# Altium PCB PCB2.PcbDoc
Units mil, origin at the board's own origin, x right, y up, seen from the top; angles counter-clockwise.
Board outline 6000 x 4000 mil, 2 copper layers (Top Layer, Bottom Layer); 24 components, 41 nets, 147 pads, 0 vias.
Unrouted connection lines stored in the file: 70.
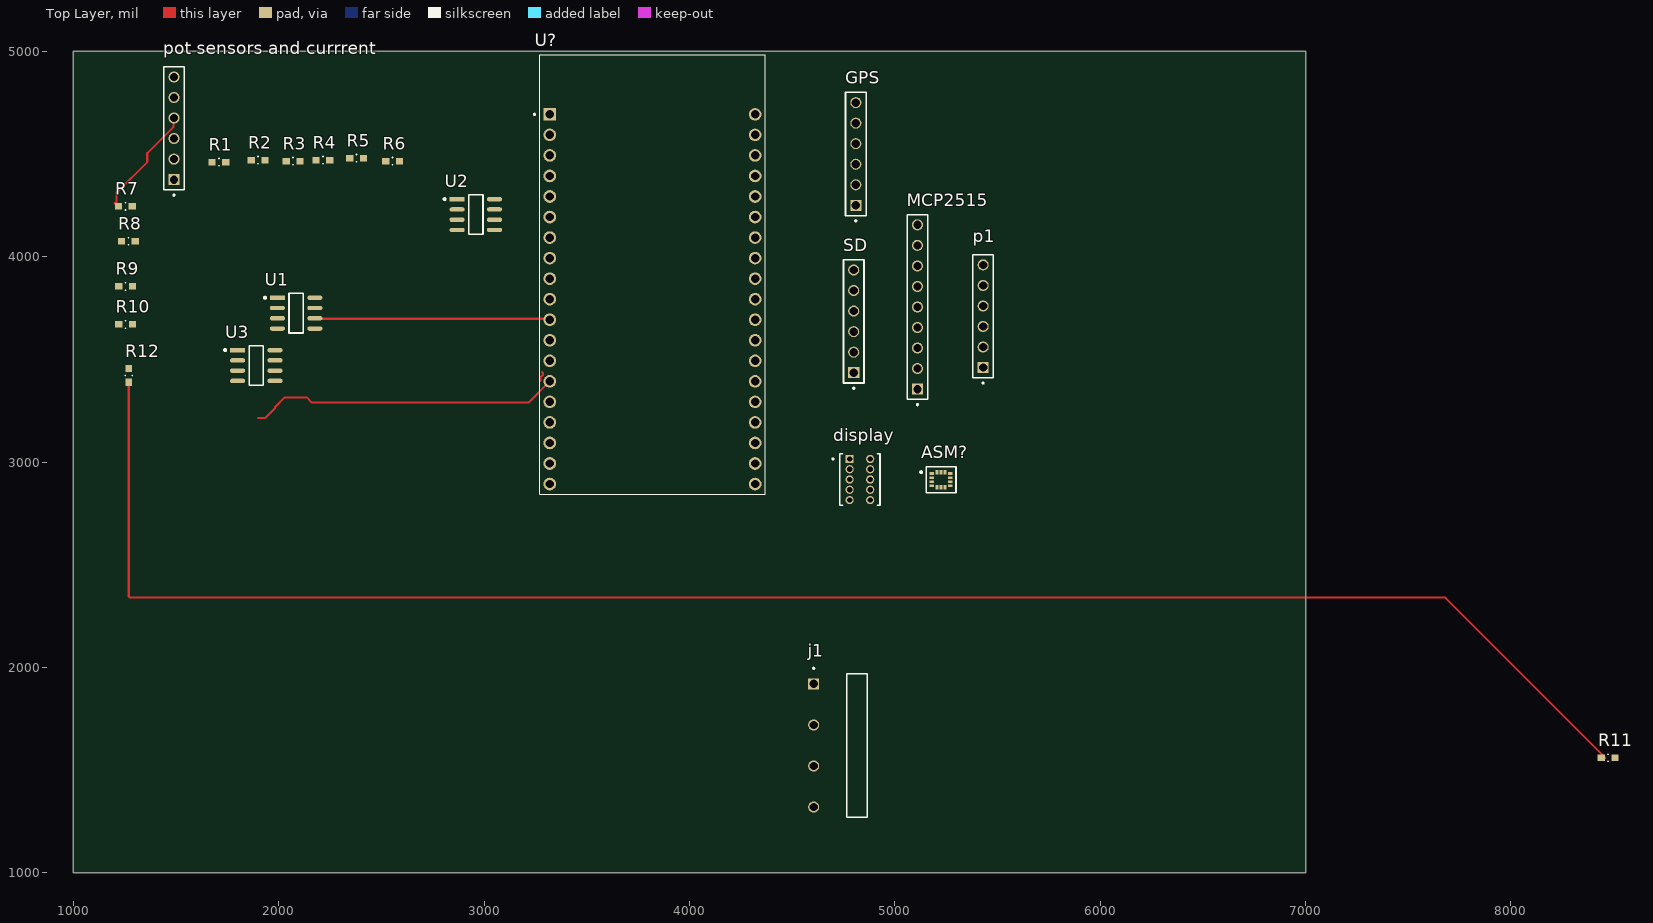
[diagram p0: Top Layer view]
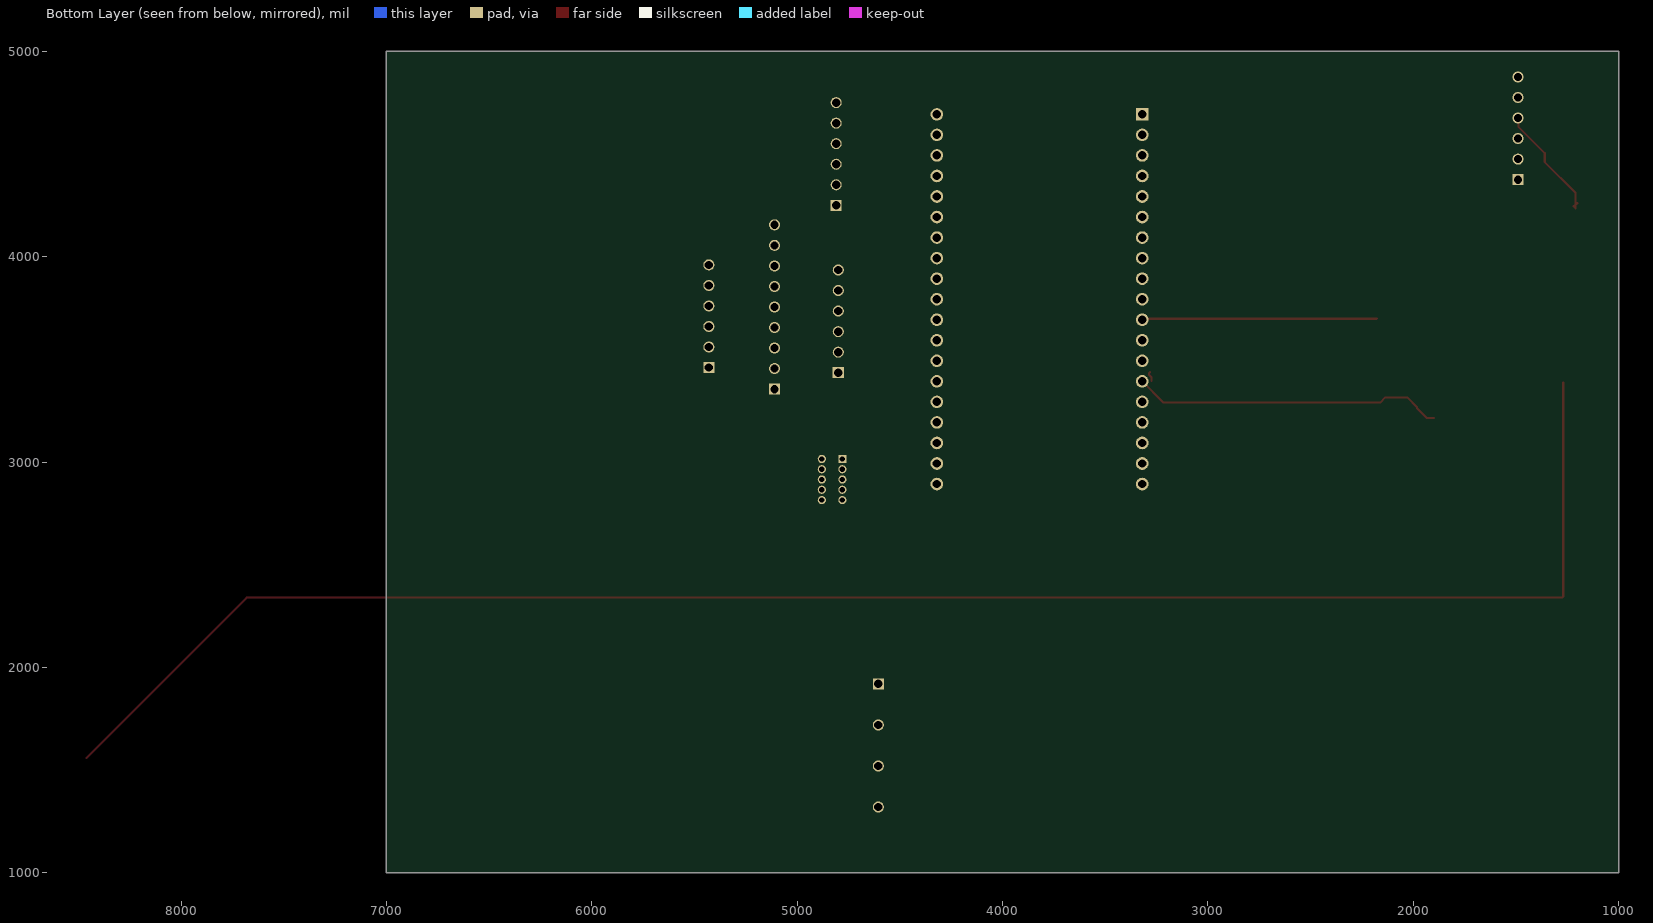
[diagram p1: Bottom Layer view, seen from below]

## Layer stack, top to bottom
Top Solder: solder mask 0.4, Solder Resist, Dk 3.5
Top Layer: signal copper 1.4
Dielectric 1: dielectric 12.6, FR-4, Dk 4.8
Bottom Layer: signal copper 1.4
Bottom Solder: solder mask 0.4, Solder Resist, Dk 3.5

## Board outline
1000,1000 7000,1000 7000,5000 1000,5000

## Design rules (kind name [scope] priority, off if disabled: settings)
Clearance [All] p1: gap=10 ignorepadtopadclearanceinfootprint=FALSE
PolygonConnect [All] p1: connectstyle=Relief reliefconductorwidth=10 reliefentries=4 polygonreliefangle="90 Angle" airgapwidth=10
RoutingVias [All] p1: holewidth=28 width=50 viastyle="Through Hole" minholewidth=28 minwidth=50 maxholewidth=28 maxwidth=50
SolderMaskExpansion [All] p1: expansion=4 istentingtop=FALSE
Width [All] p1: maxlimit=10 minlimit=10 preferedwidth=10
30 further rules are at their usual default settings.

## Components (designator, comment, footprint, x,y, rotation, side; value= is the part's Value field where it differs from the comment)
ASM? "ASM330LHHTR" FP-LGA-14L-DM00249496-MFG 5225,2914.07 r0 top
display "TMS-105-01-S-D" SAMTEC_TMS-105-01-S-D 4830,2915 r90 top
GPS "TSW-106-06-T-S-LL" SAMTEC_TSW-106-06-T-S-LL 4810,4250 r90 top
j1 "TSW-204-10-T-S-RE" SAMTEC_TSW-204-10-T-S-RE 4605,1920 r90 top
MCP2515 "TSW-109-10-G-S" SAMTEC_TSW-109-10-G-S 5110,3355 r90 top
p1 "TSW-106-06-T-S-LL" SAMTEC_TSW-106-06-T-S-LL 5430,3460 r90 top
"pot sensors and currrent" "TSW-106-06-T-S-LL" SAMTEC_TSW-106-06-T-S-LL 1490,4375 r90 top
R1 "RC0603FR-070RL" FP-RC0603-MFG 1708.46,4460 r0 top value=0Ω
R2 "RC0603FR-070RL" FP-RC0603-MFG 1900,4470 r0 top value=0Ω
R3 "RC0603FR-070RL" FP-RC0603-MFG 2070,4465 r0 top value=0Ω
R4 "RC0603FR-070RL" FP-RC0603-MFG 2215,4470 r0 top value=0Ω
R5 "RC0603FR-070RL" FP-RC0603-MFG 2380,4480 r0 top value=0Ω
R6 "RC0603FR-070RL" FP-RC0603-MFG 2555,4465 r0 top value=0Ω
R7 "RC0603FR-070RL" FP-RC0603-MFG 1253.46,4245 r0 top value=0Ω
R8 "RC0603FR-070RL" FP-RC0603-MFG 1268.46,4075 r0 top value=0Ω
R9 "RC0603FR-070RL" FP-RC0603-MFG 1255,3855 r0 top value=0Ω
R10 "RC0603FR-070RL" FP-RC0603-MFG 1255,3670 r0 top value=0Ω
R11 "RC0603FR-070RL" FP-RC0603-MFG 8473.46,1560 r0 top value=0Ω
R12 "RC0603FR-070RL" FP-RC0603-MFG 1270,3421.54 r90 top value=0Ω
SD "TSW-106-06-T-S-LL" SAMTEC_TSW-106-06-T-S-LL 4800,3435 r90 top
U1 "LM358DR2G" FP-751-07-IPC_C 2085,3725 r0 top
U2 "LM358DR2G" FP-751-07-IPC_C 2960,4205 r0 top
U3 "LM358DR2G" FP-751-07-IPC_C 1891.18,3470 r0 top
U? "ESP32-DEVKITC-32D" MODULE_ESP32-DEVKITC-32D 3820,3915 r0 top

## Footprints (in the part's own frame and the unit in brackets; to place one, negate y for a bottom-side part, rotate by r counter-clockwise, add the part's x,y. Pads: shape width x height; smd on the part's side, far side on the other; paste and mask are expansions set on the pad)
FP-751-07-IPC_C [mil]
  rect 73.78x21.39 smd paste+0 mask+0: 1(-91.18,75)
  rrect100% 73.78x21.39 smd paste+0 mask+0: 2(-91.18,25) 3(-91.18,-25) 4(-91.18,-75) 5(91.18,-75) 6(91.18,-25) 7(91.18,25) 8(91.18,75)
  silkscreen extent -157,-96 35,96, body extent -132,-100 132,100, height 10
FP-LGA-14L-DM00249496-MFG [mm]
  rect 0.575x0.35 smd paste-1000 mask+0: 1(-1.162,0.75) 2(-1.162,0.25) 3(-1.162,-0.25) 4(-1.162,-0.75) 8(1.162,-0.75) 9(1.162,-0.25) 10(1.162,0.25) 11(1.162,0.75)
  rect 0.35x0.575 smd paste-1000 mask+0: 5(-0.5,-0.913) 6(0,-0.913) 7(0.5,-0.913) 12(0.5,0.913) 13(0,0.913) 14(-0.5,0.913)
  silkscreen extent -2.57,-1.6 1.85,1.6, body extent -2.05,-1.8 2.05,1.8, height 0.25
FP-RC0603-MFG [mm]
  rect 0.9x0.8 smd paste+0 mask+0: 1(-0.85,0) 2(0.85,0)
  silkscreen extent -0.03,-0.45 0.03,0.45, body extent -1.4,-0.55 1.4,0.55, height 0.25
MODULE_ESP32-DEVKITC-32D [mm]
  rect 1.56x1.56 / inner round 1.56 / far side rect 1.56x1.56 hole 1.04: J2-1(-12.7,19.76)
  round 1.56 hole 1.04: J2-2(-12.7,17.22) J2-3(-12.7,14.68) J2-4(-12.7,12.14) J2-5(-12.7,9.6) J2-6(-12.7,7.06) J2-7(-12.7,4.52) J2-8(-12.7,1.98) J2-9(-12.7,-0.56) J2-10(-12.7,-3.1) J2-11(-12.7,-5.64) J2-12(-12.7,-8.18) J2-13(-12.7,-10.72) J2-14(-12.7,-13.26) J2-15(-12.7,-15.8) J2-16(-12.7,-18.34) J2-17(-12.7,-20.88) J2-18(-12.7,-23.42) J2-19(-12.7,-25.96) J3-1(12.7,19.76) J3-2(12.7,17.22) J3-3(12.7,14.68) J3-4(12.7,12.14) J3-5(12.7,9.6) J3-6(12.7,7.06) J3-7(12.7,4.52) J3-8(12.7,1.98) J3-9(12.7,-0.56) J3-10(12.7,-3.1) J3-11(12.7,-5.64) J3-12(12.7,-8.18) J3-13(12.7,-10.72) J3-14(12.7,-13.26) J3-15(12.7,-15.8) J3-16(12.7,-18.34) J3-17(12.7,-20.88) J3-18(12.7,-23.42) J3-19(12.7,-25.96)
  silkscreen extent -14.7,-27.25 13.95,27.15, body extent -13.97,-27.9 13.97,27.2, height 6.69
SAMTEC_TMS-105-01-S-D [mm]
  rect 1.01x1.01 hole 0.66: 01(2.54,1.27)
  round 1.01 hole 0.66: 02(2.54,-1.27) 03(1.27,1.27) 04(1.27,-1.27) 05(0,1.27) 06(0,-1.27) 07(-1.27,1.27) 08(-1.27,-1.27) 09(-2.54,1.27) 10(-2.54,-1.27)
  silkscreen extent -3.17,-2.49 3.17,3.44
SAMTEC_TSW-106-06-T-S-LL [mm]
  rect 1.37x1.37 hole 1.02: 01(0,0)
  round 1.37 hole 1.02: 02(2.54,0) 03(5.08,0) 04(7.62,0) 05(10.16,0) 06(12.7,0)
  silkscreen extent -2.02,-1.27 13.97,1.27
SAMTEC_TSW-109-10-G-S [mm]
  rect 1.37x1.37 hole 1.02: 01(0,0)
  round 1.37 hole 1.02: 02(2.54,0) 03(5.08,0) 04(7.62,0) 05(10.16,0) 06(12.7,0) 07(15.24,0) 08(17.78,0) 09(20.32,0)
  silkscreen extent -2.02,-1.27 21.59,1.27
SAMTEC_TSW-204-10-T-S-RE [mm]
  rect 1.37x1.37 / inner round 1.37 / far side rect 1.37x1.37 hole 1.02: 01(0,0)
  round 1.37 hole 1.02: 02(-5.08,0) 03(-10.16,0) 04(-15.24,0)
  silkscreen extent -16.51,-6.64 2.02,0.1

## Part data
ASM?: library part CMP-12177-000004-1, "AUTOMOTIVE 6-AXIS INERTIAL MODUL", Manufacturer=STMicroelectronics, Max Supply Voltage=3.6V, Min Supply Voltage=1.62V, Operating Supply Current=360-1300uA, Package=LGA-14L-DM00249496, Temperature="-40°C to +105°C", Temperature Range High=+105°C, Temperature Range Low=-40°C, Accel Range=2/4/8/16g, Automotive=Yes, Automotive Grade="Grade 2", Category=IC, ComponentLink2Description=Datasheet, ComponentLink2URL=https://www.st.com/resource/en/datasheet/asm330lhh.pdf, Device Class L1=Sensors, Device Class L2="Motion Sensors", Device Class L3="Inertial Measurement Units (IMUs)", Digikey Description="AUTOMOTIVE 6-AXIS INERTIAL MODUL", Footprint Url=https://www.st.com/content/ccc/resource/technical/document/technical_note/73/17/9c/16/dd/96/4a/01/CD00134799.pdf/files/CD00134799.pdf/jcr:content/translations/en.CD00134799.pdf, Gyro Range=125/250/500/1000/2000/4000°/s, Height=0.86mm, Lead Free=Yes, Manufacturer Part Number=ASM330LHHTR, Mouser Description="Automotive 6-Axis Inertial Module 3D Accelerometer and 3D Gyroscope 14-Pin LGA T/R", Octopart=https://octopart.com/asm330lhhtr-stmicroelectronics-93180171, Resolution=16bits, RoHS=TRUE, Sensor Output=I2C,SPI, Sensor Type=Temperature,Accelerometer,Gyroscope
display GPS MCP2515 p1 "pot sensors and currrent" SD: Package=None, Availability=Unavailable, Price=None
  display: MP=TMS-105-01-S-D
  GPS p1 "pot sensors and currrent" SD: MP=TSW-106-06-T-S-LL
  MCP2515: MP=TSW-109-10-G-S
j1: "Connector Header Through Hole 4 position 0.200 (5.08mm)", Package=None, Check_prices=https://www.snapeda.com/parts/TSW-204-10-T-S-RE/Samtec/view-part/?ref=eda, MF=Samtec, MP=TSW-204-10-T-S-RE, SnapEDA_Link=https://www.snapeda.com/parts/TSW-204-10-T-S-RE/Samtec/view-part/?ref=snap
R1 R2 R3 R4 R5 R6 R7 R8 R9 R10 R11 R12: library part CMP-2000-06925-2, "RES SMD 0 OHM JUMPER 1/10W 0603", Manufacturer=Yageo, Package=RC0603, Power Rating=0.1W, Resistance=0Ω, Temperature="-55°C to +155°C", Temperature Range High=+155°C, Temperature Range Low=-55°C, Tolerance=1%, Voltage Rating=75V, Automotive=No, Category=Res, ComponentLink2Description=Datasheet, ComponentLink2URL=http://www.yageo.com/documents/recent/PYu-RC_Group_51_RoHS_L_10.pdf, Composition="Thick Film", Device Class L1="Passive Components", Device Class L2=Resistors, Device Class L3="Chip SMD Resistors", Digikey Description="RES SMD 0 OHM JUMPER 1/10W 0603", Footprint Url=http://www.yageo.com/exep/pages/download/literatures/PYu-R_Mount_10.pdf, Height=0.55mm, Ipc Land Pattern Name=RESC16080X45, Lead Free=Yes, Manufacturer Part Number=RC0603FR-070RL, Mouser Description="RC Series 0603 0.1 W 0 O Jumper Surface Mount Thick Film Chip Resistor", Octopart=https://octopart.com/rc0603fr-070rl-yageo-1180803, RoHS=TRUE, Series=RC_L
U1 U2 U3: library part CMP-1310-00291-2, "IC OPAMP GP 2 CIRCUIT 8SOIC", Case/Package=SOIC, Dual Supply Voltage=9V, Input Bias Current=250nA, Input Offset Voltage (Vos)=7mV, Max Dual Supply Voltage=16V, Max Operating Temperature=70°C, Max Supply Voltage=32V, Min Dual Supply Voltage=1.5V, Min Operating Temperature=0°C, Min Supply Voltage=3V, Nominal Supply Current=1.2mA, Operating Supply Current=1.5mA, Output Current=40mA, Package Quantity=2500, Power Supply Rejection Ratio (PSRR)=65dB, Voltage Gain=100dB, Bandwidth=1MHz, Common Mode Rejection Ratio=65dB, Contact Plating=Tin, Gain Bandwidth Product=1MHz, Halogen Free="Halogen Free", Height=1.5mm, Lead Free="Lead Free", Length=5mm, Number of Amplifiers=2, Number of Channels=2, Number of Circuits=2, Number of Elements=2, Number of Pins=8, Operating Supply Voltage=16V, Output Current per Channel=40mA, Packaging="Tape and Reel", Radiation Hardening=No, REACH SVHC="No SVHC", Slew Rate=0.6V/µs, Width=4mm
U?: "WiFi Development Tools (802.11) ESP32 General Development Kit, ESP32-WROOM-32D on the board", Package=None, Check_prices=https://www.snapeda.com/parts/ESP32-DEVKITC-32D/Espressif+Systems/view-part/?ref=eda, MF="Espressif Systems", MP=ESP32-DEVKITC-32D, SnapEDA_Link=https://www.snapeda.com/parts/ESP32-DEVKITC-32D/Espressif+Systems/view-part/?ref=snap

## Nets (pads, with @x,y where several pads share a name; then routed paths per layer and width w, separated by ;. In a path a pad name is that pad's centre, name@x,y a point inside that pad or via, vN(x,y) a via of type N, cw(c..) or ccw(c..) an arc to the next point about the centre after c; other vN are vias at no path point)
3.3V: ASM?.5 ASM?.8 j1.03
5V: display.01 GPS.05 j1.02 MCP2515.07 SD.05 U1.8 U2.8 U?.J2-1
A2+: R1.2 R2.1 U1.3
A22+: R5.2 R6.1 U2.3
A232+: R9.2 R10.1
A242+: R11.2 R12.1 | length 8557.7
  Top Layer w10: R12.1 1270,2345.86 1275.86,2340 7680,2340 8460,1560
B1+: R3.2 R4.1 U1.5
B11+: R7.2 R8.1 U2.5
Buffer_pot: R11.1 U?.J3-11
"CAN CLK": MCP2515.02 U?.J2-12
"CAN CS": MCP2515.05 U?.J3-16
"CAN INT": MCP2515.01 U?.J3-12
"CAN MISO": MCP2515.04 U?.J2-13
"CAN MOSI": MCP2515.03 U?.J2-15
CAN_H: MCP2515.08 p1.05
CAN_L: MCP2515.09 p1.06
CLK1: ASM?.13 display.04 GPS.02 SD.02 U?.J3-9
current: U3.1 U3.2
"D C": display.09 U?.J3-13
Enable: j1.01 U?.J2-2
GND: ASM?.6 display.03 GPS.06 j1.04 MCP2515.06 SD.06 U3.4 U?.J2-14 U?.J3-7 | length 1518.2
  Top Layer w10: 1900,3214.3 1934.21,3214.3 1982.1,3262.2 1982.1,3267.1 2030,3315 2136.3,3315 2162,3289.3 3216.35,3289.3 U?.J2-14
"GPS CS": GPS.01 U?.J3-6
"IMU CS": ASM?.12 U?.J3-3
"LCD CS": display.02 U?.J3-14
MISO1: ASM?.1 display.08 GPS.04 SD.04 U?.J3-2
MOSI1: ASM?.14 display.06 GPS.03 SD.03 U?.J3-8
"POT_FL ": U2.6 U2.7 U?.J2-4
POT_FL_in: "pot sensors and currrent.04" R7.1 | length 595.2
  Top Layer w10: 1200,4260 1203.03,4260 1210,4253.03 1210,4235 R7.1 1210,4255 1210,4310 1360,4460 1360,4504.35 1488.68,4633.03 1488.68,4673.68 1490,4675
"POT_FR ": U2.1 U2.2 U?.J2-3
POT_FR_in: "pot sensors and currrent.03" R5.1
POT_RL: U1.6 U1.7 U?.J2-11 | length 1160.8
  Top Layer w10: U1.6 2178.36,3697.82 3322.18,3697.82 3327.05,3692.95 U?.J2-11
POT_RL_in: "pot sensors and currrent.02" R3.1
POT_RR: U1.1 U1.2 U?.J2-10
POT_RR_in: "pot sensors and currrent.01" R1.1
pressure: R9.1 U?.J2-6
RST: display.07 U?.J3-15
"SD CARD CS": SD.01 U?.J3-10
"speed FL": p1.01 U?.J2-5
"speed FR": p1.02 U?.J2-8
"speed RL": p1.03 U?.J2-7
"speed RR": p1.04 U?.J2-9
pads on no net: "pot sensors and currrent.05" "pot sensors and currrent.06" ASM?.2 ASM?.3 ASM?.4 ASM?.7 ASM?.9 ASM?.10 ASM?.11 display.05 display.10 R2.2 R4.2 R6.2 R8.2 R10.2 R12.2 U1.4 U2.4 U3.3 U3.5 U3.6 U3.7 U3.8 U?.J2-16 U?.J2-17 U?.J2-18 U?.J2-19 U?.J3-1 U?.J3-4 U?.J3-5 U?.J3-17 U?.J3-18 U?.J3-19
copper on no net: | length 51.3
  Top Layer w10: 3274.29,3395 3274.29,3411.89 3286.92,3424.52 3286.92,3432.8 3281.07,3438.66